# Altium PCB paw4.PcbDoc
Units mm, origin at the board's own origin, x right, y up, seen from the top; angles counter-clockwise.
Board outline 50 x 50 mm, 2 copper layers (Top Layer, Bottom Layer); 40 components, 67 nets, 201 pads, 39 vias.
Unrouted connection lines stored in the file: 8.
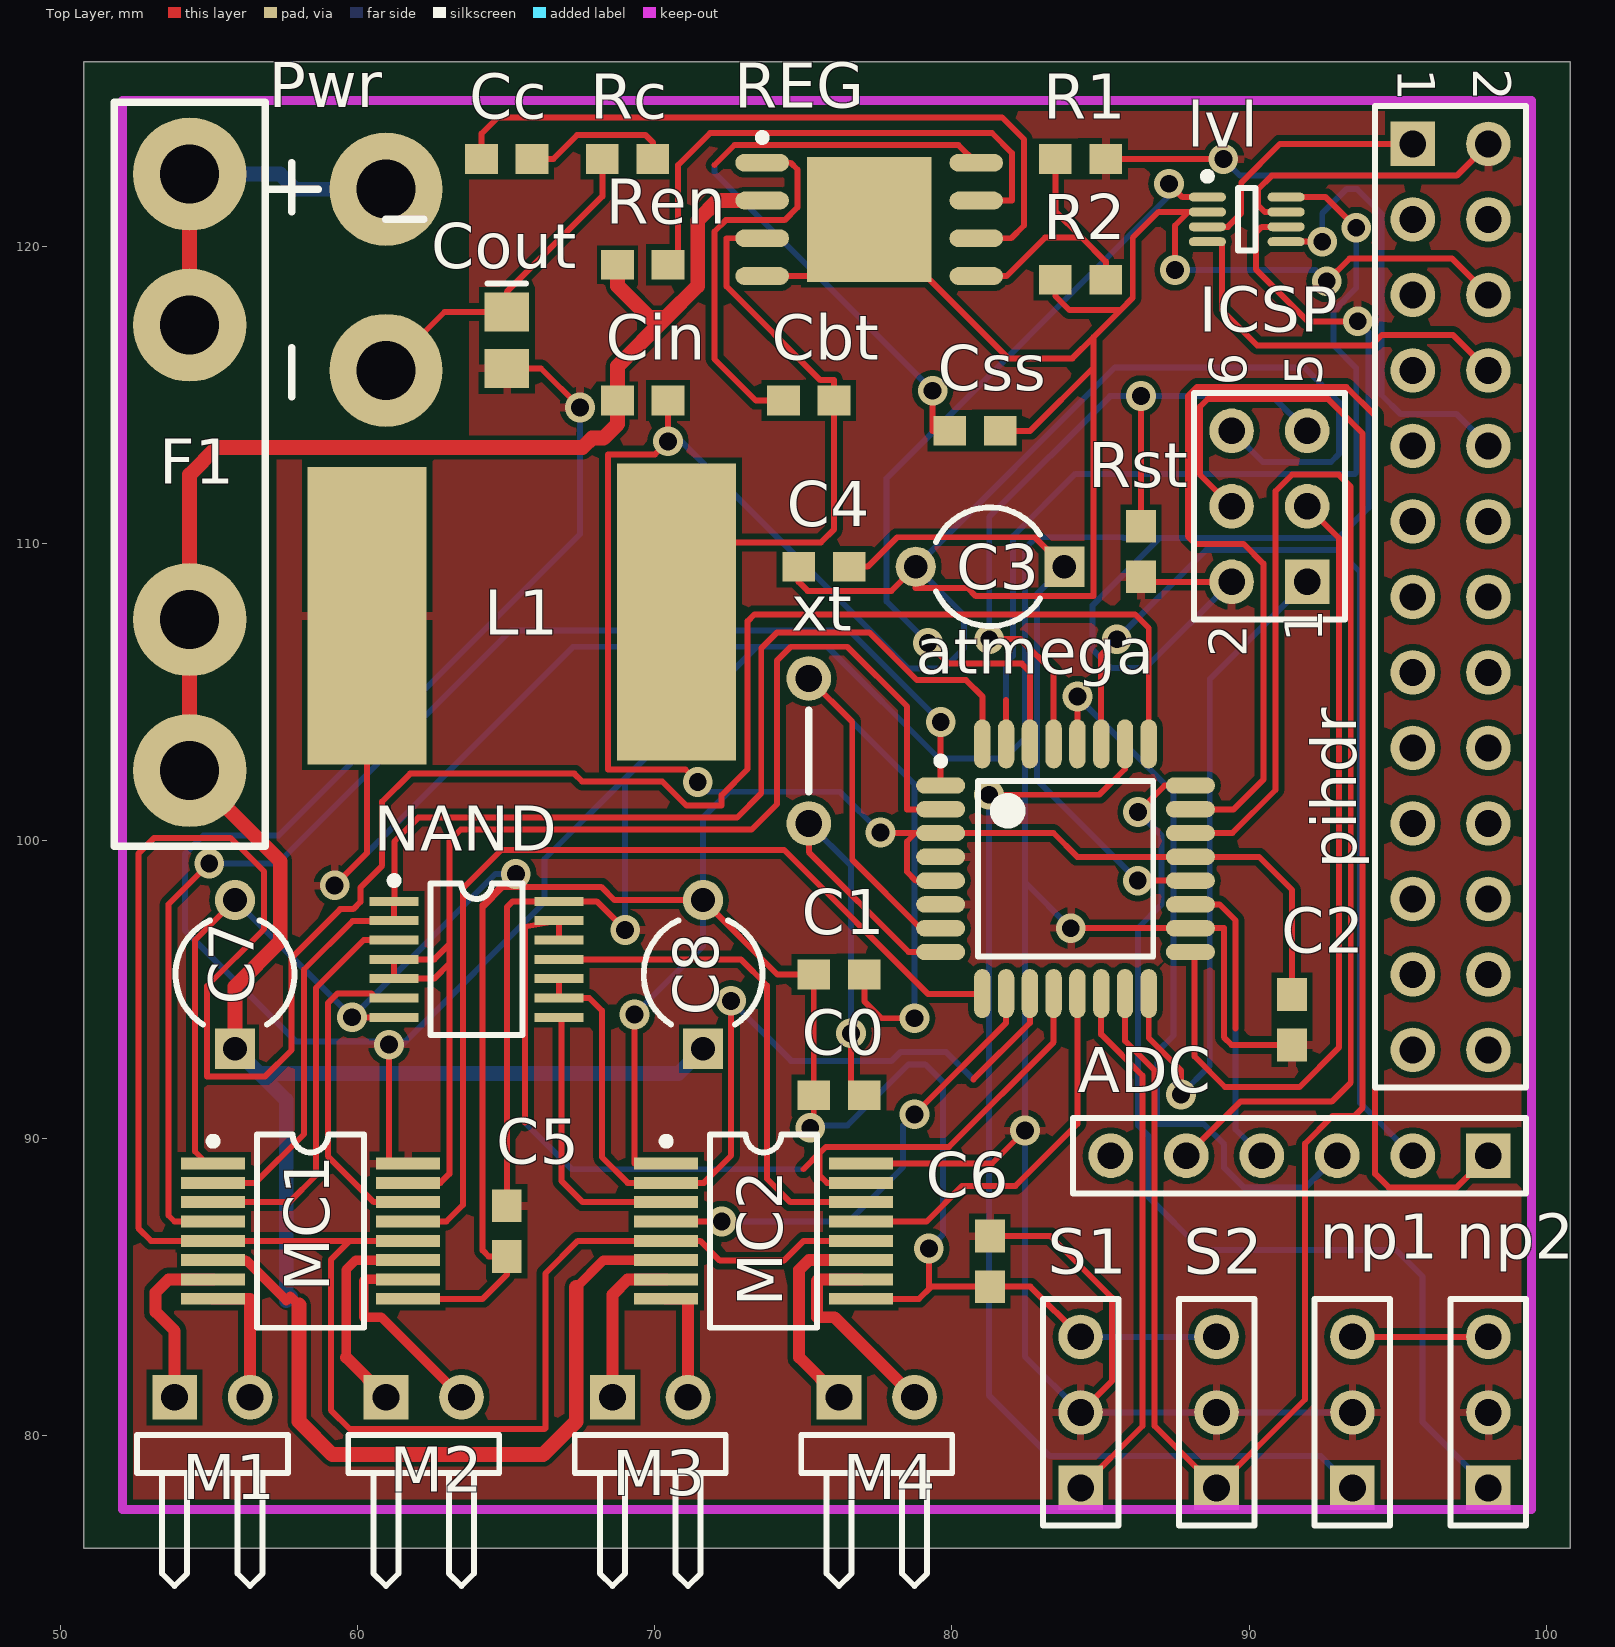
[diagram p0: Top Layer view]
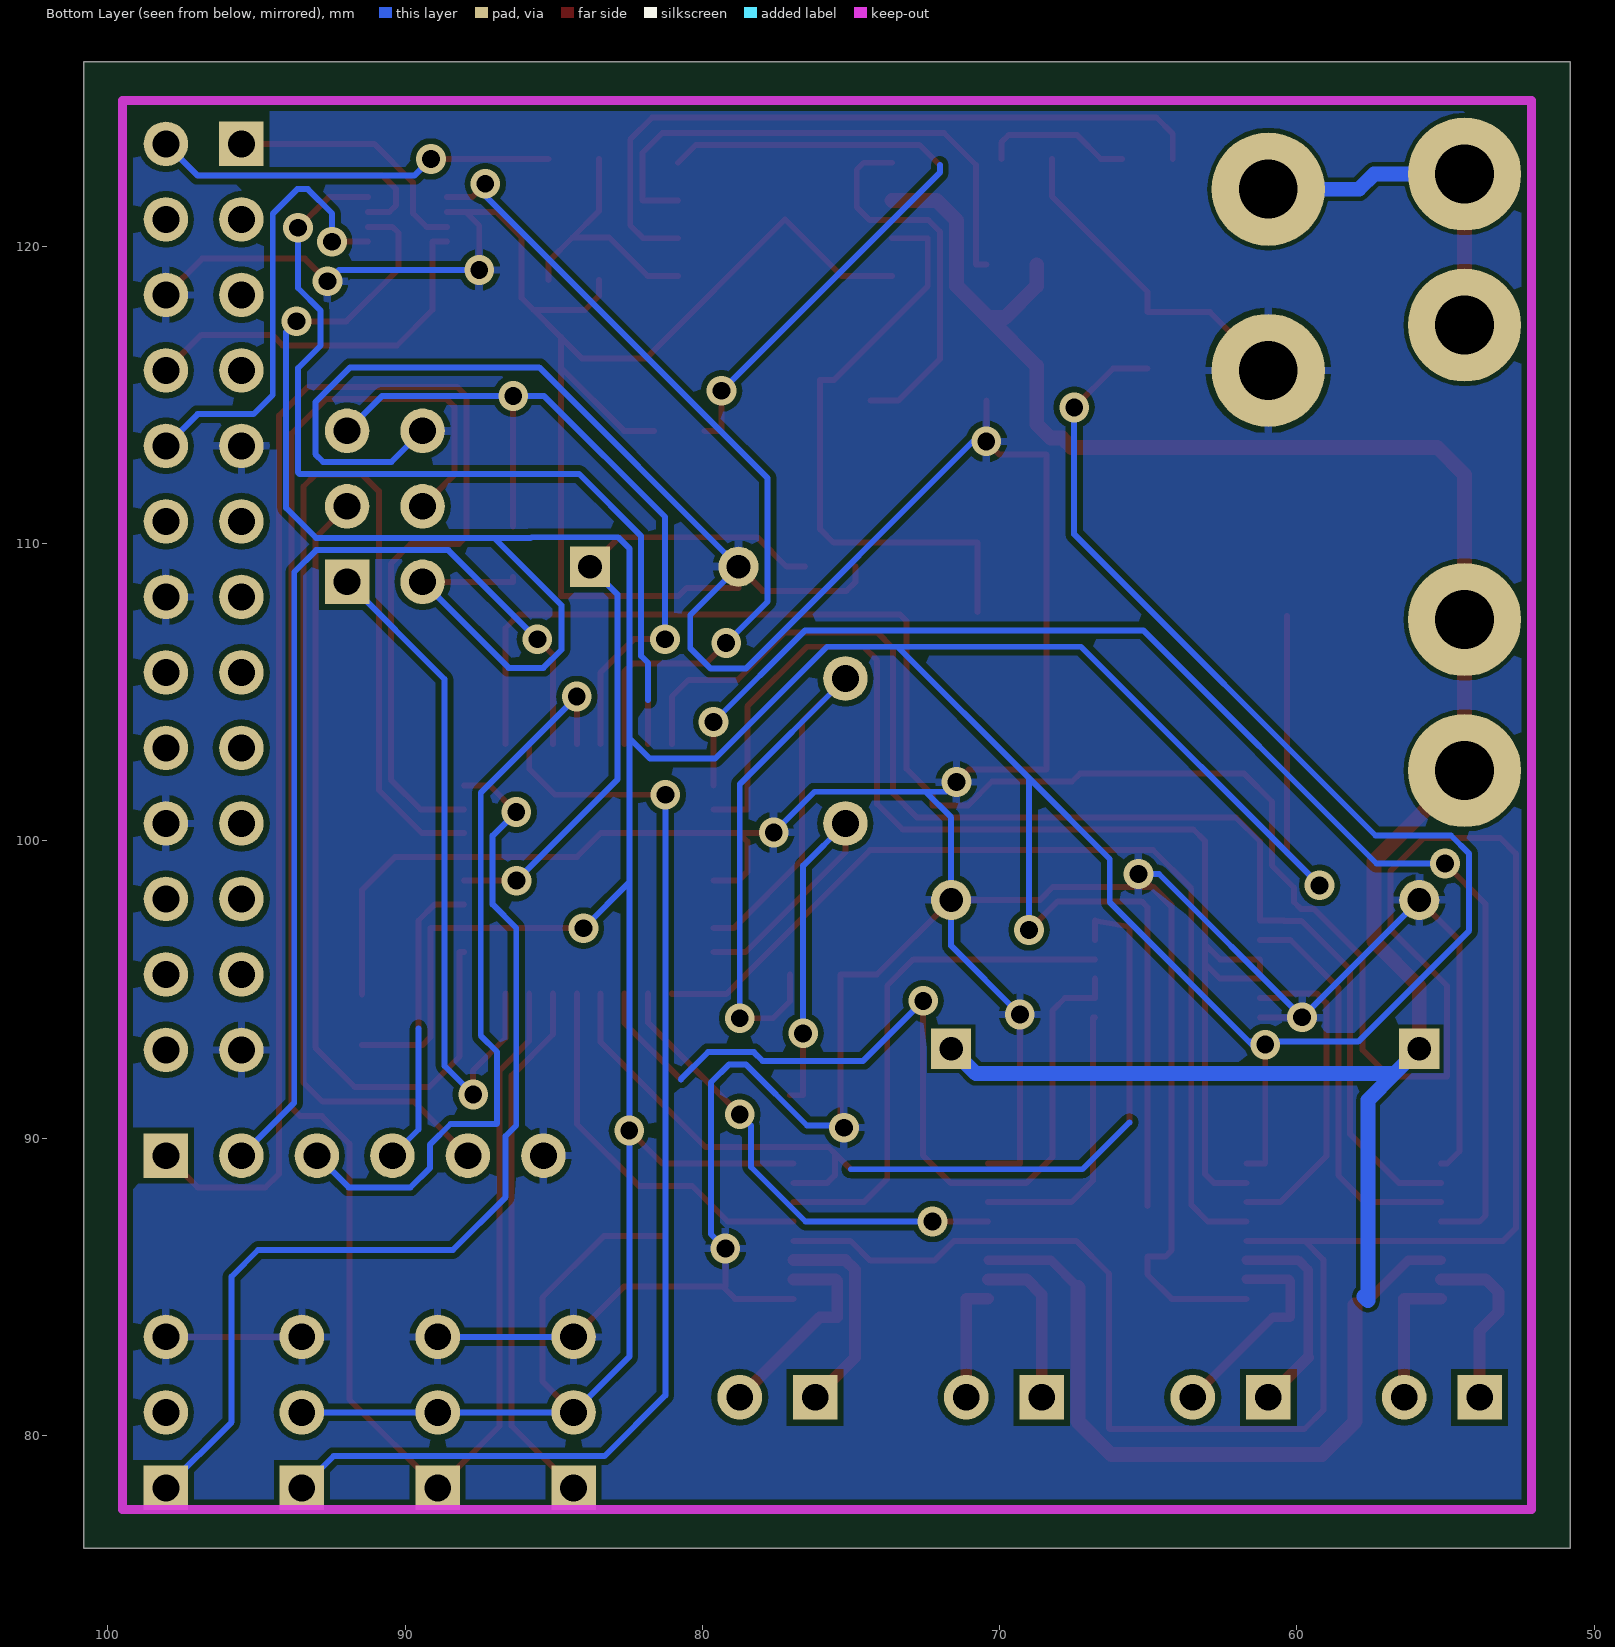
[diagram p1: Bottom Layer view, seen from below]

## Layer stack, top to bottom
Top Layer: signal copper 0.0356
Dielectric: dielectric 0.32, FR-4, Dk 4.8
Bottom Layer: signal copper 0.0356

## Board outline
50.8,76.2 100.8,76.2 100.8,126.2 50.8,126.2

## Design rules (kind name [scope] priority, off if disabled: settings)
Clearance Clearance_1 [InNetClass('12V')] p1: gap=0.15
Clearance [All] p2: gap=0.2
PolygonConnect [All] p1: connectstyle=Relief reliefconductorwidth=0.254 reliefentries=4 polygonreliefangle="90 Angle"
RoutingVias [All] p1: holewidth=0.6 width=1 viastyle="Through Hole" minholewidth=0.711 minwidth=1.27 maxholewidth=0.711 maxwidth=1.27
SMDNeckDown [All] p1: percent=80.000
SilkscreenOverComponentPads [All] p1: minsilkscreentomaskgap=0.254
SolderMaskExpansion [All] p1: expansion=0.102
TestPointUsage [All] p1: valid=0 allowmultiple=FALSE
Testpoint [All] p1: side=15 testpointundercomponent=TRUE minsize=1.016 maxsize=2.54 preferedsize=1.524 minholesize=0 maxholesize=1.016 preferedholesize=0.813 testpointgrid=0.025 style=1023 order=0123456789
Width Width_2 [InNetClass('12V')] p1: maxlimit=1 minlimit=0.254 preferedwidth=0.5
Width Width_1 [InNetClass('Motor')] p2: maxlimit=0.4 minlimit=0.254 preferedwidth=0.4
Width [All] p3: maxlimit=0.2 minlimit=0.2 preferedwidth=0.2
23 further rules are at their usual default settings.

## Classes and differential pairs
net class Motor: NetM1_1 NetM1_2 NetM2_1 NetM2_2 NetM3_1 NetM3_2 NetM4_1 NetM4_2
net class 12V: NetF1_1 VBATT
component class U_PwrSupply: Cbt Cc Cin Cout Css L1 R1 R2 Rc REG Ren
component class U_MotorDriverToshiba: C5 C6 C7 C8 M1 M2 M3 M4 MC1 MC2 NAND
component class RpiPaw1_Sch: ADC atmega C0 C1 C2 C3 C4 F1 ICSP lvl np1 np2 pihdr Pwr Rst S1 S2 xt

## Components (designator, comment, footprint, x,y, rotation, side; value= is the part's Value field where it differs from the comment)
ADC "A0A4A5A6A7" HDR1X6 98.044,89.408 r180 top
atmega "ATmega328P-AUR" TQFP32_N 83.82,99.06 r0 top
C0 "" J1-0603 76.2,91.44 r0 top
C1 "" J1-0603 76.2,95.504 r0 top
C2 "Cap" J1-0603 91.44,93.98 r270 top
C3 "" CAPR5-4X5 81.28,109.22 r180 top
C4 "Cap" J1-0603 75.692,109.22 r0 top
C5 "" J1-0603 65.024,86.868 r90 top
C6 "" J1-0603 81.28,85.852 r90 top
C7 "" CAPR5-4X5 55.88,95.504 r90 top
C8 "" CAPR5-4X5 71.628,95.504 r90 top
Cbt "" J1-0603 75.184,114.808 r180 top
Cc "" J1-0603 65.024,122.936 r0 top
Cin "" J1-0603 69.596,114.808 r180 top
Cout "" C0805 65.024,116.84 r270 top
Css "" J1-0603 80.772,113.792 r180 top
F1 "Fuse 1" FusePad1 54.356,122.428 r270 top
ICSP "Header 3X2" HDR2X3 91.948,108.712 r90 top
L1 "" Inductor_Paw 65.532,107.696 r180 top
lvl "TXB0102" TSSOP50P310X90-8N 89.916,120.904 r0 top
M1 "Header 2H" HDR1X2H 53.848,81.28 r0 top
M2 "Header 2H" HDR1X2H 60.96,81.28 r0 top
M3 "Header 2H" HDR1X2H 68.58,81.28 r0 top
M4 "Header 2H" HDR1X2H 76.2,81.28 r0 top
MC1 "TB6552FNG" SSOP16 58.42,86.868 r270 top
MC2 "TB6552FNG" SSOP16 73.66,86.868 r270 top
NAND "MM74HC132MTC" TSSOP14 64.008,96.012 r270 top
np1 "neoPix2" HDR1X3 93.472,78.232 r90 top
np2 "neoPix1" HDR1X3 98.044,78.232 r90 top
pihdr "Header 13X2" HDR2X13 95.504,123.444 r270 top
Pwr "Header 2" PwrPlug1 60.96,115.824 r90 top
R1 "" J1-0603 84.328,122.936 r0 top
R2 "" J1-0603 84.328,118.872 r0 top
Rc "" J1-0603 69.088,122.936 r0 top
REG "RT8250GSP" SOP-8-C_N 77.216,120.904 r0 top
Ren "" J1-0603 69.596,119.38 r180 top
Rst "Res2" J1-0603 86.36,109.728 r270 top
S1 "Servo1" HDR1X3 84.328,78.232 r90 top
S2 "Servo2" HDR1X3 88.9,78.232 r90 top
xt "16MHz" "Axial 0.2" 75.184,100.584 r90 top

## Footprints (in the part's own frame and the unit in brackets; to place one, negate y for a bottom-side part, rotate by r counter-clockwise, add the part's x,y. Pads: shape width x height; smd on the part's side, far side on the other; paste and mask are expansions set on the pad)
"Axial 0.2" [mm]
  round 1.5 hole 0.9: 1(0,0) 2(4.877,0)
  silkscreen extent 1.07,0 3.81,0
C0805 [mm] "Chip Capacitor; Body 2.0 x 1.2 mm (LxW typ)"
  rect 1.3x1.5 smd: 1(-0.95,0) 2(0.95,0)
  silkscreen extent -1.9,-0.65 -1.9,0.65
CAPR5-4X5 [mm] "Capacitor; 2 Leads"
  rect 1.35x1.35 hole 0.8: 1(-2.5,0)
  round 1.35 hole 0.8: 2(2.5,0)
  silkscreen extent -1.69,-2 1.82,2
FusePad1 [mil]
  round 150 hole 78: 1(0,0) 1(200,0) 2(590,0) 2(790,0)
  silkscreen extent -95,-100 890,100
HDR1X2H [mm] "Connector; Header; 2 Position; Right Angle"
  rect 1.5x1.5 hole 0.9: 1(0,0)
  round 1.5 hole 0.9: 2(2.54,0)
  silkscreen extent -1.27,-6.35 3.81,-1.27
HDR1X3 [mm] "Connector; Header; 3 Position"
  rect 1.5x1.5 hole 0.9: 1(0,0)
  round 1.5 hole 0.9: 2(2.54,0) 3(5.08,0)
  silkscreen extent -1.27,-1.27 6.35,1.27
HDR1X6 [mm] "Connector; Header; 6 Position"
  rect 1.5x1.5 hole 0.9: 1(0,0)
  round 1.5 hole 0.9: 2(2.54,0) 3(5.08,0) 4(7.62,0) 5(10.16,0) 6(12.7,0)
  silkscreen extent -1.27,-1.27 13.97,1.27
HDR2X3 [mm] "Connector; Header; 3x2 Position"
  rect 1.5x1.5 hole 0.9: 1(0,0)
  round 1.5 hole 0.9: 2(0,2.54) 3(2.54,0) 4(2.54,2.54) 5(5.08,0) 6(5.08,2.54)
  silkscreen extent -1.27,-1.27 6.35,3.81
HDR2X13 [mm] "Connector; Header; 13x2 Position"
  rect 1.5x1.5 hole 0.9: 1(0,0)
  round 1.5 hole 0.9: 2(0,2.54) 3(2.54,0) 4(2.54,2.54) 5(5.08,0) 6(5.08,2.54) 7(7.62,0) 8(7.62,2.54) 9(10.16,0) 10(10.16,2.54) 11(12.7,0) 12(12.7,2.54) 13(15.24,0) 14(15.24,2.54) 15(17.78,0) 16(17.78,2.54) 17(20.32,0) 18(20.32,2.54) 19(22.86,0) 20(22.86,2.54) 21(25.4,0) 22(25.4,2.54) 23(27.94,0) 24(27.94,2.54) 25(30.48,0) 26(30.48,2.54)
  silkscreen extent -1.27,-1.27 31.75,3.81
Inductor_Paw [mm]
  rect 4x10 smd: 1(-5.207,0) 2(5.207,0.127)
  body extent -4.77,-4.36 4.19,4.62, height 4
J1-0603 [mm] "Chip Resistor; Body 1.6 x 0.8 mm (LxW typ)"
  rect 1.1x1 smd: 1(-0.85,0) 2(0.85,0)
PwrPlug1 [mil]
  round 150 hole 78: 1(0,0) 2(240,0)
  silkscreen extent -35,-50 275,160
SOP-8-C_N [mm] "8-Pin Small Outline Package 1.27 mm Pitch, IPC Medium Density"
  oval 1.8x0.6 smd: 1(-3.6,1.905) 2(-3.6,0.635) 3(-3.6,-0.635) 4(-3.6,-1.905) 5(3.6,-1.905) 6(3.6,-0.635) 7(3.6,0.635) 8(3.6,1.905)
  rect 4.2x4.2 smd: 9(0,0)
  silkscreen extent -3.72,2.63 -3.47,2.88, body extent -2.11,-2.28 2.11,2.28, height 1.45
SSOP16 [mm] "SSOP; 16 Leads; Body Width 5.3 mm; Pitch 0.65 mm"
  rect 0.4x2.15 smd: 1(-2.275,-3.275) 2(-1.625,-3.275) 3(-0.975,-3.275) 4(-0.325,-3.275) 5(0.325,-3.275) 6(0.975,-3.275) 7(1.625,-3.275) 8(2.275,-3.275) 9(2.275,3.275) 10(1.625,3.275) 11(0.975,3.275) 12(0.325,3.275) 13(-0.325,3.275) 14(-0.975,3.275) 15(-1.625,3.275) 16(-2.275,3.275)
  silkscreen extent -3.25,-3.4 3.25,1.8
TQFP32_N [mm] "32-Pin Plastic Thin Quad Flat Pack (TFQP32), IPC Medium Density"
  oval 1.65x0.55 smd: 1(-4.2,2.8) 2(-4.2,2) 3(-4.2,1.2) 4(-4.2,0.4) 5(-4.2,-0.4) 6(-4.2,-1.2) 7(-4.2,-2) 8(-4.2,-2.8) 17(4.2,-2.8) 18(4.2,-2) 19(4.2,-1.2) 20(4.2,-0.4) 21(4.2,0.4) 22(4.2,1.2) 23(4.2,2) 24(4.2,2.8)
  oval 0.55x1.65 smd: 9(-2.8,-4.2) 10(-2,-4.2) 11(-1.2,-4.2) 12(-0.4,-4.2) 13(0.4,-4.2) 14(1.2,-4.2) 15(2,-4.2) 16(2.8,-4.2) 25(2.8,4.2) 26(2,4.2) 27(1.2,4.2) 28(0.4,4.2) 29(-0.4,4.2) 30(-1.2,4.2) 31(-2,4.2) 32(-2.8,4.2)
  silkscreen extent -4.32,-2.95 2.95,3.75, body extent -3.5,-3.5 3.5,3.5, height 1.2
TSSOP14 [mm] "Shrink Small Outline; 14 Leads; Body Width 4.4 mm; Pitch 0.65 mm"
  rect 0.3x1.65 smd: 1(-1.95,-2.775) 2(-1.3,-2.775) 3(-0.65,-2.775) 4(0,-2.775) 5(0.65,-2.775) 6(1.3,-2.775) 7(1.95,-2.775) 8(1.95,2.775) 9(1.3,2.775) 10(0.65,2.775) 11(0,2.775) 12(-0.65,2.775) 13(-1.3,2.775) 14(-1.95,2.775)
  silkscreen extent -2.77,-2.9 2.55,1.55
TSSOP50P310X90-8N [mm] "TSSOP, 8-Leads, Body 2.1x2.4mm (max), Pitch 0.50mm, IPC Medium Density"
  oval 1.25x0.3 smd: 1(-1.325,0.75) 2(-1.325,0.25) 3(-1.325,-0.25) 4(-1.325,-0.75) 5(1.325,-0.75) 6(1.325,-0.25) 7(1.325,0.25) 8(1.325,0.75)
  silkscreen extent -1.45,-1.05 0.3,1.57, body extent -1.2,-1.05 1.2,1.05, height 0.9

## Part data
ADC: library part "Header 6", "Header, 6-Pin"
atmega: "8-bit AVR Microcontroller, 32KB Flash, 1KB EEPROM, 2KB SRAM, 32-pin TQFP, Industrial Grade (-40°C to 85°C)"
C0 C1: library part Cap, "Capacitor"
C2 C4: "Capacitor"
C3 C7 C8: library part Cap2, "Capacitor"
C5 C6 Cbt Cc Cin Cout Css: library part CAP, "Capacitor"
F1: "Fuse"
ICSP: "Header, 3-Pin, Dual row"
L1: library part Inductor, "Inductor"
lvl: "3.3V Level translator"
M1 M2 M3 M4: "Header, 2-Pin, Right Angle"
MC1 MC2: "2CH 1A PMIC"
NAND: "4Ch NAND Gate"
np1 np2 S1 S2: library part "Header 3", "Header, 3-Pin"
pihdr: "Header, 13-Pin, Dual row"
Pwr: "Header, 2-Pin"
R1 R2 Rc Ren: library part Res3, "Resistor"
REG: "3A 5V Buck Regulator"
Rst: "Resistor"
xt: library part XTAL, "Crystal Oscillator"

## Via types
v1: diameter 1, hole 0.6, Top Layer to Bottom Layer, 39 vias

## Nets (pads, with @x,y where several pads share a name; then routed paths per layer and width w, separated by ;. In a path a pad name is that pad's centre, name@x,y a point inside that pad or via, vN(x,y) a via of type N, cw(c..) or ccw(c..) an arc to the next point about the centre after c; other vN are vias at no path point)
+3.3V: lvl.3 pihdr.1 | length 8.7
  Top Layer w0.2: lvl.3 89.278,120.654 89.731,121.107 89.731,122.142 91.034,123.444 pihdr.1
+5V: atmega.4 atmega.6 atmega.18 C2.2 C5.2 C6.2 Cout.2 ICSP.2 L1.2 lvl.6 lvl.7 MC1.16 MC2.16 NAND.14 np1.2 np2.2 pihdr.2 R1.2 Rst.2 S1.2 S2.2 | length 306.3
  Top Layer w0.2: v1(59.233,98.501) 60.325,99.593 L1.2 ; v1(61.062,93.142) 61.062,89.143 MC1.16 ; C5.2 65.024,97.765 65.221,97.962 NAND.14 68.047,97.962 v1(69.006,97.003) ; Cout.2 66.177,115.89 v1(67.488,114.579) ; MC2.16 81.345,89.143 v1(82.455,90.252) ; C6.2 83.312,86.702 85.378,84.636 85.378,81.822 S1.2 ; v1(83.998,97.06) atmega.18 89.145,97.06 89.145,93.393 89.408,93.13 C2.2 ; R1.2 v1(89.129,122.936) ; Rst.2 86.36,108.712 ICSP.2 ; lvl.6 90.424,120.654 90.221,120.451 90.221,119.228 91.973,117.475 v1(93.65,117.475) ; lvl.7 90.526,121.154 90.297,121.383 90.297,121.92 90.754,122.377 96.977,122.377 pihdr.2
  Bottom Layer w0.2: v1(59.233,98.501) 67.259,106.528 73.431,106.528 ; v1(61.062,93.142) 61.284,92.919 61.609,93.243 ; v1(67.488,114.579) 67.488,110.312 57.353,100.178 54.813,100.178 54.204,99.568 54.204,96.977 57.937,93.243 61.062,93.243 61.609,93.243 ; v1(69.006,97.003) 69.006,102.102 ; v1(83.998,97.06) 82.455,98.603 ; v1(89.129,122.936) 89.687,122.377 96.977,122.377 pihdr.2 ; ICSP.2 86.512,105.816 85.344,105.816 84.734,106.426 84.734,107.925 86.995,110.185 ; np1.2 S2.2 S1.2 82.455,82.645 v1(82.455,90.252) ; v1(93.65,117.475) 94.005,117.119 94.005,111.201 92.989,110.185 ; 61.609,93.243 66.293,97.928 ; 61.609,93.243 66.293,97.928 ; 66.293,97.928 66.293,99.389 69.006,102.102 ; 69.006,102.102 73.431,106.528 ; 69.006,102.102 73.431,106.528 ; 73.431,106.528 75.806,106.528 ; 73.431,106.528 75.806,106.528 ; 75.806,106.528 79.565,102.768 81.763,102.768 82.455,103.46 ; v1(82.455,90.252) 82.455,98.603 ; v1(82.455,90.252) 82.455,98.603 ; 82.455,98.603 82.455,103.46 ; 82.455,98.603 82.455,103.46 ; 82.455,98.603 82.455,103.46 ; 82.455,103.46 82.455,109.836 ; 82.455,103.46 82.455,109.836 ; 82.455,103.46 82.455,109.836 ; 82.455,103.46 82.455,109.836 ; 82.455,109.836 82.829,110.211 85.75,110.211 85.776,110.185 86.995,110.185 ; 86.995,110.185 92.989,110.185 ; 86.995,110.185 92.989,110.185
GND: ADC.6 atmega.3 atmega.5 atmega.21 C0.1 C1.1 C2.1 C3.2 C4.1 C5.1 C6.1 C7.2 C8.2 Cin.1 Cout.1 Css.1 ICSP.6 lvl.2 MC1.1 MC1.9 MC2.1 MC2.9 NAND.7 np1.3 np2.3 pihdr.6 pihdr.9 pihdr.14 pihdr.20 pihdr.25 Pwr.1 R2.1 Rc.1 REG.4 REG.9 S1.3 S2.3 | length 285.8
  Top Layer w0.2: MC1.1 54.94,89.143 54.534,89.549 54.534,96.658 C7.2 ; v1(59.817,94.062) v1(59.822,94.062) ; Pwr.1 62.926,117.79 Cout.1 65.024,118.466 68.238,121.68 Rc.1 ; MC1.9 64.211,84.593 65.024,85.406 C5.1 64.414,86.018 64.211,86.221 ; v1(65.329,98.882) 64.897,98.45 ; v1(69.317,94.158) 69.317,89.143 MC2.1 ; Cin.1 v1(70.446,113.436) 70.006,112.996 68.428,112.996 68.428,102.396 71.035,102.396 v1(71.45,101.981) ; REG.4 75.311,118.999 REG.9 81.89,116.23 84.049,116.23 84.76,116.942 ; C4.1 74.842,108.712 75.147,108.407 77.967,108.407 C3.2 78.78,108.509 80.524,108.509 80.804,108.229 84.76,108.229 84.76,115.924 ; v1(75.235,90.348) 75.35,90.463 C0.1 C1.1 74.128,95.504 C8.2 68.645,98.004 68.199,98.45 65.329,98.45 64.897,98.45 ; MC2.9 78.892,84.593 79.301,85.002 ; v1(77.597,100.279) 77.616,100.26 78.772,100.26 ; v1(79.223,86.284) 79.223,85.002 79.301,85.002 ; atmega.5 78.784,98.66 78.486,98.958 78.486,99.974 78.772,100.26 ; Css.1 82.628,113.792 84.76,115.924 ; R2.1 83.478,118.325 83.947,117.856 85.674,117.856 ; S1.3 82.638,85.002 C6.1 79.301,85.002 ; v1(87.503,119.202) 87.503,120.701 87.956,121.154 ; C2.1 91.44,98.349 90.329,99.46 atmega.21 84.214,99.46 83.414,100.26 atmega.3 ; v1(92.608,118.821) 93.37,119.583 96.825,119.583 pihdr.6 ; np1.3 np2.3 ; v1(59.822,94.062) NAND.7 v1(59.822,94.062) ; 64.211,86.221 64.211,97.765 ; 64.211,86.221 64.211,97.765 ; 64.211,97.765 64.211,97.841 64.821,98.45 64.897,98.45 ; 64.211,97.765 64.897,98.45 ; 78.772,100.26 atmega.3 ; 78.772,100.26 atmega.3 ; 84.76,115.924 84.76,116.942 ; 84.76,115.924 84.76,116.942 ; 84.76,116.942 85.674,117.856 ; 84.76,116.942 85.674,117.856 ; 85.674,117.856 86.081,118.262 ; 85.674,117.856 86.081,118.262 ; 85.674,117.856 86.081,118.262 ; 86.081,118.262 86.081,120.294 86.94,121.154 87.956,121.154 ; 87.956,121.154 lvl.2 87.956,121.154
  Bottom Layer w0.2: C7.2 v1@59.82,94.065 ; v1(59.817,94.062) v1@59.82,94.065 ; v1(59.822,94.062) v1@59.82,94.065 ; v1(65.329,98.882) 64.637,98.882 v1@59.82,94.065 ; v1(69.317,94.158) 71.628,96.469 C8.2 71.628,100.787 72.492,101.651 ; v1(70.446,113.436) 70.891,113.436 78.537,105.791 79.718,105.791 80.404,106.477 80.404,107.596 C3.2 85.486,115.926 91.846,115.926 93.015,114.757 93.015,113.005 92.752,112.742 90.458,112.742 ICSP.6 ; v1(71.45,101.981) 71.78,101.651 72.492,101.651 ; v1(75.235,90.348) 75.311,90.424 76.479,90.424 78.537,92.481 79.096,92.481 79.705,91.872 79.705,86.766 v1(79.223,86.284) ; v1(77.597,100.279) 76.225,101.651 ; S1.3 S2.3 ; v1(87.503,119.202) 92.227,119.202 v1(92.608,118.821) ; 72.492,101.651 76.225,101.651 ; 72.492,101.651 76.225,101.651
GPIO0(SDA): pihdr.3
GPIO1(SCL): pihdr.5
GPIO4: pihdr.7
GPIO7(CE1): pihdr.26
GPIO8(CE0): pihdr.24
GPIO9(MISO): pihdr.21
GPIO10(MOSI): pihdr.19
GPIO17: pihdr.11
GPIO18: pihdr.12
GPIO21: pihdr.13
GPIO22: pihdr.15
GPIO23: pihdr.16
GPIO24: pihdr.18
GPIO25: pihdr.22
GPIO(SCLK): pihdr.23
MISO: atmega.16 ICSP.1 | length 22.8
  Top Layer w0.2: atmega.16 86.62,93.364 87.706,92.278 v1(87.706,91.465)
  Bottom Layer w0.2: v1(87.706,91.465) 88.671,92.431 88.671,105.435 ICSP.1
MOSI: atmega.15 ICSP.4 S2.1 | length 65.7
  Top Layer w0.2: atmega.15 85.82,93.27 86.817,92.272 86.817,80.315 S2.1 91.874,81.206 91.874,89.814 92.797,90.737 93.529,90.737 93.815,91.023 93.815,113.703 92.659,114.859 88.595,114.859 88.341,114.605 88.341,112.319 ICSP.4
NetADC_1: ADC.1 atmega.23 | length 54.5
  Top Layer w0.2: atmega.23 89.478,101.06 90.475,102.057 90.475,109.322 89.814,109.982 88.189,109.982 87.935,110.236 87.935,114.96 88.24,115.265 93.269,115.265 94.234,114.3 94.234,88.798 94.691,88.341 96.977,88.341 ADC.1
NetADC_2: ADC.2 atmega.27 | length 33.8
  Top Layer w0.2: atmega.27 85.02,106.254 v1(85.547,106.782)
  Bottom Layer w0.2: v1(85.547,106.782) 88.544,109.779 92.989,109.779 93.726,109.042 93.726,91.186 ADC.2
NetADC_3: ADC.3 atmega.28 | length 25.4
  Top Layer w0.2: atmega.28 v1(84.22,104.851)
  Bottom Layer w0.2: v1(84.22,104.851) 87.452,101.619 87.452,93.446 86.906,92.901 86.906,90.495 86.926,90.475 88.468,90.475 89.154,89.789 89.154,89.002 89.814,88.341 91.897,88.341 ADC.3
NetADC_4: ADC.4 atmega.19 | length 10
  Top Layer w0.2: atmega.19 89.002,97.86 89.545,97.317 89.545,93.685
  Bottom Layer w0.2: 89.545,93.685 89.545,90.287 ADC.4
NetADC_5: ADC.5 atmega.22 | length 43
  Top Layer w0.2: ADC.5 89.699,91.223 92.774,91.223 93.415,91.863 93.415,111.919 93.015,112.319 91.44,112.319 90.881,111.76 90.881,101.708 89.433,100.26 atmega.22
Netatmega_1: atmega.1 MC1.4 | length 45.3
  Top Layer w0.2: v1(55.016,99.238) 53.645,97.866 53.645,87.396 53.848,87.193 MC1.4 ; atmega.1 v1(79.62,103.997)
  Bottom Layer w0.2: v1(55.016,99.238) 57.321,99.238 65.164,107.08 76.536,107.08 v1(79.62,103.997)
Netatmega_2: atmega.2 MC1.15 NAND.4 NAND.5 | length 51.5
  Top Layer w0.2: MC1.15 62.789,88.493 63.094,88.798 63.094,95.87 ; atmega.2 78.486,101.06 78.486,104.521 76.479,106.528 74.574,106.528 74.117,106.07 74.117,101.239 73.259,100.381 63.475,100.381 63.094,100 ; 63.094,95.87 62.586,95.362 NAND.5 NAND.4 62.586,96.012 63.094,96.52 ; 63.094,95.87 63.094,96.52 ; 63.094,95.87 63.094,96.52 ; 63.094,96.52 63.094,100 ; 63.094,96.52 63.094,100 ; 63.094,96.52 63.094,100
Netatmega_7: atmega.7 C1.2 xt.2 | length 26.4
  Top Layer w0.2: xt.2 76.644,104 76.644,99.358 78.943,97.06 atmega.7 ; C1.2 77.05,94.603 77.622,94.031 v1(78.74,94.031)
  Bottom Layer w0.2: xt.2 78.74,101.905 v1(78.74,94.031)
Netatmega_8: atmega.8 C0.2 xt.1 | length 17
  Top Layer w0.2: xt.1 75.184,99.619 78.543,96.26 atmega.8 ; v1(76.606,93.523) 76.606,91.44 C0.2
  Bottom Layer w0.2: xt.1 76.606,99.162 v1(76.606,93.523)
Netatmega_9: atmega.9 MC1.13 | length 32.8
  Top Layer w0.2: MC1.13 62.992,87.193 63.551,87.752 63.551,98.4 64.84,99.689 74.352,99.689 79.197,94.844 81.02,94.844 atmega.9
Netatmega_10: atmega.10 MC2.4 | length 16
  Top Layer w0.2: MC2.4 v1(72.253,87.193) ; v1(78.738,90.797) 81.82,93.878 atmega.10
  Bottom Layer w0.2: v1(72.253,87.193) 76.525,87.193 78.359,89.027 78.359,90.417 v1(78.738,90.797)
Netatmega_11: atmega.11 MC2.2 NAND.9 NAND.10 | length 30.6
  Top Layer w0.2: NAND.10 NAND.9 67.797,94.712 68.224,94.285 68.224,89.357 69.088,88.493 MC2.2 71.653,88.493 72.568,89.408 v1(72.568,94.615) ; 80.721,91.973 82.62,93.872 atmega.11
  Bottom Layer w0.2: v1(72.568,94.615) 74.587,92.595 77.972,92.595 78.264,92.888 79.807,92.888 80.721,91.973
Netatmega_12: atmega.12 MC2.15 NAND.12 NAND.13 | length 32.8
  Top Layer w0.2: 65.634,90.526 65.634,97.109 NAND.13 NAND.12 ; 75.006,88.95 75.54,89.484 ; MC2.15 75.794,88.493 75.54,88.747 75.54,89.484 ; atmega.12 83.42,93.224 79.896,89.7 75.756,89.7 ; 75.54,89.484 75.756,89.7 ; 75.54,89.484 75.756,89.7
  Bottom Layer w0.2: 65.634,90.526 67.209,88.95 75.006,88.95
Netatmega_13: atmega.13 MC2.13 | length 13
  Top Layer w0.2: MC2.13 79.146,87.193 80.345,88.392 82.137,88.392 84.22,90.475 atmega.13
Netatmega_14: atmega.14 S1.1 | length 18.1
  Top Layer w0.2: S1.1 86.411,80.315 86.411,92.1 85.02,93.491 atmega.14
Netatmega_20: atmega.20 C3.1 C4.2 | length 22.2
  Top Layer w0.2: C4.2 77.165,109.22 78.156,110.211 82.789,110.211 C3.1 ; v1(86.252,98.66) atmega.20
  Bottom Layer w0.2: C3.1 82.855,108.295 82.855,102.057 v1(86.252,98.66)
Netatmega_24: atmega.24 np2.1 | length 34.2
  Top Layer w0.2: v1(86.258,100.965) 87.153,101.86 atmega.24
  Bottom Layer w0.2: v1(86.258,100.965) 87.052,100.171 87.052,97.86 86.258,97.066 86.258,90.424 86.614,90.068 86.614,88.011 88.392,86.233 94.945,86.233 95.834,85.344 95.834,80.442 np2.1
Netatmega_25: atmega.25 MC1.5 MC1.12 MC2.5 MC2.12 | length 114.3
  Top Layer w0.2: MC1.12 59.741,86.543 ; MC2.12 75.011,86.543 74.346,85.877 72.192,85.877 71.526,86.543 MC2.5 67.417,86.543 66.319,85.446 66.319,80.239 66.294,80.213 59.741,80.213 59.106,80.848 59.106,85.908 59.741,86.543 ; atmega.25 86.62,107.157 86.157,107.62 73.355,107.62 73.127,107.391 73.127,102.413 72.25,101.536 72.25,101.181 71.069,101.181 70.254,101.996 67.56,101.996 67.296,102.26 61.773,102.26 60.833,101.321 60.833,99.162 60.096,98.425 60.096,97.942 59.855,97.701 59.417,97.701 57.785,96.069 57.785,92.964 56.896,92.075 54.94,92.075 54.94,95.113 56.855,97.028 56.855,98.974 55.728,100.101 53.162,100.101 52.629,99.568 52.629,86.97 53.055,86.543 MC1.5 59.741,86.543
Netatmega_26: atmega.26 np1.1 | length 39.5
  Top Layer w0.2: v1(81.242,101.549) 84.956,101.549 85.82,102.413 atmega.26
  Bottom Layer w0.2: v1(81.242,101.549) 81.242,81.344 83.287,79.299 92.405,79.299 np1.1
Netatmega_30: atmega.30 lvl.1 | length 27.7
  Top Layer w0.2: v1(79.197,106.655) 79.893,105.959 82.348,105.959 82.62,105.687 atmega.30 ; v1(87.3,122.102) 87.748,121.654 lvl.1
  Bottom Layer w0.2: v1(79.197,106.655) 77.8,108.052 77.8,112.196 87.3,121.696 v1(87.3,122.102)
Netatmega_31: atmega.31 lvl.8 | length 31.2
  Top Layer w0.2: atmega.31 81.82,104.743 ; lvl.8 92.57,121.654 v1(93.599,120.625)
  Bottom Layer w0.2: 81.82,104.743 81.82,105.982 82.055,106.216 82.055,110.249 84.148,112.342 93.556,112.342 93.599,112.385 93.599,115.902 92.837,116.664 92.837,117.833 93.599,118.595 v1(93.599,120.625)
Netatmega_32: atmega.32 MC1.2 NAND.1 NAND.2 | length 43.7
  Top Layer w0.2: MC1.2 56.566,88.493 58.204,90.131 58.204,95.669 59.836,97.301 60.422,97.301 60.433,97.312 NAND.2 NAND.1 61.239,97.962 61.239,99.974 62.046,100.781 72.769,100.781 73.584,101.596 73.584,106.477 74.117,107.01 77.216,107.01 78.816,105.41 80.467,105.41 81.02,104.857 atmega.32
NetCbt_1: Cbt.1 L1.1 REG.3 | length 20.6
  Top Layer w0.2: L1.1 70.739,110.033 75.59,110.033 76.034,110.476 Cbt.1 76.034,115.496 75.573,115.496 72.415,118.653 72.415,120.269 REG.3
NetCbt_2: Cbt.2 REG.1 | length 12.9
  Top Layer w0.2: REG.1 74.574,122.809 74.803,122.58 74.803,121.31 74.371,120.879 72.39,120.879 72.009,120.498 72.009,116.205 73.406,114.808 Cbt.2
NetCc_1: Cc.1 REG.6 | length 24.3
  Top Layer w0.2: Cc.1 64.174,123.788 64.719,124.333 81.686,124.333 82.423,123.596 82.423,120.701 81.991,120.269 REG.6
NetCc_2: Cc.2 Rc.2 | length 5.1
  Top Layer w0.2: Cc.2 66.588,122.936 67.388,123.736 69.698,123.736 69.938,123.496 Rc.2
NetCss_2: Css.2 REG.8 | length 21.9
  Top Layer w0.2: 72.009,122.733 72.685,123.409 80.216,123.409 REG.8 ; v1(79.35,115.138) 79.35,113.792 Css.2
  Bottom Layer w0.2: 72.009,122.733 72.009,122.479 v1(79.35,115.138)
NetF1_1: F1.1 Pwr.2 | length 11.9
  Top Layer w0.5: F1.1@54.356,117.348 F1.1@54.356,122.428
  Bottom Layer w0.5: F1.1@54.356,122.428 57.404,122.428 57.912,121.92 Pwr.2
NetM1_1: M1.1 MC1.7 | length 5.9
  Top Layer w0.4: M1.1 53.848,83.515 53.213,84.15 53.213,84.811 53.645,85.243 MC1.7
NetM1_2: M1.2 MC1.8 | length 4.6
  Top Layer w0.4: MC1.8 56.388,84.593 M1.2
NetM2_1: M2.1 MC1.11 | length 7.1
  Top Layer w0.32: 59.62,82.62 59.62,85.569 59.944,85.893 MC1.11
  Top Layer w0.4: 59.62,82.62 M2.1
NetM2_2: M2.2 MC1.10 | length 7.1
  Top Layer w0.32: MC1.10 60.27,85.243 60.22,85.193 60.22,83.972 60.808,83.972 M2.2
NetM3_1: M3.1 MC2.7 | length 5.5
  Top Layer w0.4: M3.1 68.58,84.735 69.088,85.243 MC2.7
NetM3_2: M3.2 MC2.8 | length 4
  Top Layer w0.4: MC2.8 71.12,84.593 M3.2
NetM4_1: M4.1 MC2.11 | length 7.1
  Top Layer w0.4: M4.1 74.86,82.62 74.86,85.569 75.184,85.893 MC2.11
NetM4_2: M4.2 MC2.10 | length 7.1
  Top Layer w0.4: MC2.10 75.51,85.243 75.46,85.193 75.46,83.972 76.048,83.972 M4.2
NetMC1_3: MC1.3 NAND.3 | length 13.4
  Top Layer w0.2: MC1.3 57.709,87.843 58.604,88.738 58.604,95.053 60.213,96.662 NAND.3
NetMC1_14: MC1.14 NAND.6 | length 10.9
  Top Layer w0.2: NAND.6 60.63,94.712 60.473,94.869 59.334,94.869 59.004,94.539 59.004,89.392 60.554,87.843 MC1.14
NetMC2_3: MC2.3 NAND.8 | length 9.4
  Top Layer w0.2: NAND.8 66.859,94.062 66.859,88.564 67.58,87.843 MC2.3
NetMC2_14: MC2.14 NAND.11 | length 17.3
  Top Layer w0.2: NAND.11 72.898,96.012 73.777,95.133 73.777,88.631 74.565,87.843 MC2.14
NetR1_1: R1.1 R2.2 REG.5 | length 10.1
  Top Layer w0.2: REG.5 81.839,118.999 83.134,120.294 84.365,120.294 ; R1.1 83.478,121.182 ; R2.2 85.178,119.482 84.365,120.294 ; 83.478,121.182 84.365,120.294 ; 83.478,121.182 84.365,120.294
NetREG_7: REG.7 Ren.1 | length 18.4
  Top Layer w0.2: Ren.1 70.79,119.38 70.79,122.733 71.866,123.809 81.347,123.809 82.017,123.139 82.017,121.539 REG.7
RESET: atmega.29 ICSP.5 Rst.1 | length 30.8
  Top Layer w0.2: v1(81.255,106.782) 82.302,106.782 83.42,105.664 atmega.29 ; Rst.1 v1(86.36,114.96)
  Bottom Layer w0.2: v1(81.255,106.782) 81.255,110.896 85.319,114.96 v1(86.36,114.96) ; ICSP.5 90.78,114.96 ; v1(86.36,114.96) 90.78,114.96 ; v1(86.36,114.96) 90.78,114.96
RXD: lvl.5 pihdr.10 | length 15.2
  Top Layer w0.2: lvl.5 v1(92.456,120.154)
  Bottom Layer w0.2: v1(92.456,120.154) 92.456,121.107 93.269,121.92 93.624,121.92 94.45,121.095 94.45,114.999 95.098,114.351 96.977,114.351 pihdr.10
SCK: atmega.17 ICSP.3 | length 28.1
  Top Layer w0.2: atmega.17 88.163,96.26 88.163,92.741 89.185,91.719 91.694,91.719 93.015,93.04 93.015,110.185 ICSP.3
TXD: lvl.4 pihdr.8 | length 12.9
  Top Layer w0.2: lvl.4 89.078,120.154 89.078,117.856 90.27,116.664 94.114,116.664 94.468,117.018 96.85,117.018 pihdr.8
VBATT: C7.1 C8.1 Cin.2 F1.2 MC1.6 MC2.6 REG.2 Ren.2 | length 101.4
  Top Layer w0.32: MC1.6 56.245,85.893 57.607,84.531 57.747,84.671 58.039,84.379 ; 67.361,84.979 68.275,85.893 MC2.6
  Top Layer w0.5: C7.1 55.88,95.094 57.405,96.619 57.405,99.313 54.356,102.362 54.356,107.442 54.356,112.319 55.27,113.233 67.576,113.233 67.889,113.546 68.275,113.546 68.746,114.017 Cin.2 68.746,115.969 70.379,117.602 ; 58.039,84.379 58.039,80.467 59.157,79.35 66.243,79.35 67.361,80.467 67.361,84.979 ; Ren.2 68.746,118.669 69.813,117.602 70.379,117.602 ; REG.2 72.111,121.539 71.446,120.874 71.446,118.669 ; 70.379,117.602 71.446,118.669 ; 70.379,117.602 71.446,118.669
  Bottom Layer w0.5: C7.1 56.718,92.166 ; 57.747,84.671 57.607,84.531 57.607,91.277 56.718,92.166 ; C8.1 70.79,92.166 56.718,92.166
pads on no net: pihdr.4 pihdr.17

## Polygon pours and split planes (outlines as drawn)
+5V on Top Layer "top 5" (solid, pour order 1000): 52.1,77.5 99.665,77.5 99.949,77.216 99.949,124.451 99.5,124.9 99.051,125.349 63.754,125.349 63.754,113.157 63.881,113.03 63.754,112.903 57.277,112.903 57.277,99.695 57.15,99.568 56.642,100.076 52.1,100.076
GND on Bottom Layer "bot-gnd" (solid, pour order 1001): 52.1,124.587 52.1,77.5 99.5,77.5 99.5,124.9

## Keep-outs
Keep-Out Layer:
  lines w0.3: 52.1,77.5 52.1,124.9 99.5,124.9 99.5,77.5 52.1,77.5

## Silkscreen, mask and mechanical layers (free items; w line width, h text height)
Drill Drawing:
  text ".LEGEND" at 105.88,81.28 h1.52
  text "Drill Drawing." at 105.88,78.74 h1.52

## Dimensions
52.1,77.5 to 52.1,124.9 on Mechanical 1
52.1,77.5 to 99.5,77.5 on Mechanical 1

## Text inside footprints (layer, text, board x,y; h text height)
ICSP: Top Overlay "6" at 89.916,115.316 h1.27 r90; Top Overlay "5" at 92.456,115.316 h1.27 r90; Top Overlay "2" at 89.916,106.172 h1.27 r90; Top Overlay "1" at 92.456,106.68 h1.27 r90
pihdr: Top Overlay "2" at 97.536,125.984 h1.27 r270; Top Overlay "1" at 94.996,125.984 h1.27 r270